# Altium PCB LaunchPad Mini.PcbDoc
Units mil, origin at the board's own origin, x right, y up, seen from the top; angles counter-clockwise.
Board outline 6000 x 4000 mil, 2 copper layers (Top Layer, Bottom Layer); 18 components, 30 nets, 82 pads, 4 vias.
Unrouted connection lines stored in the file: 1.
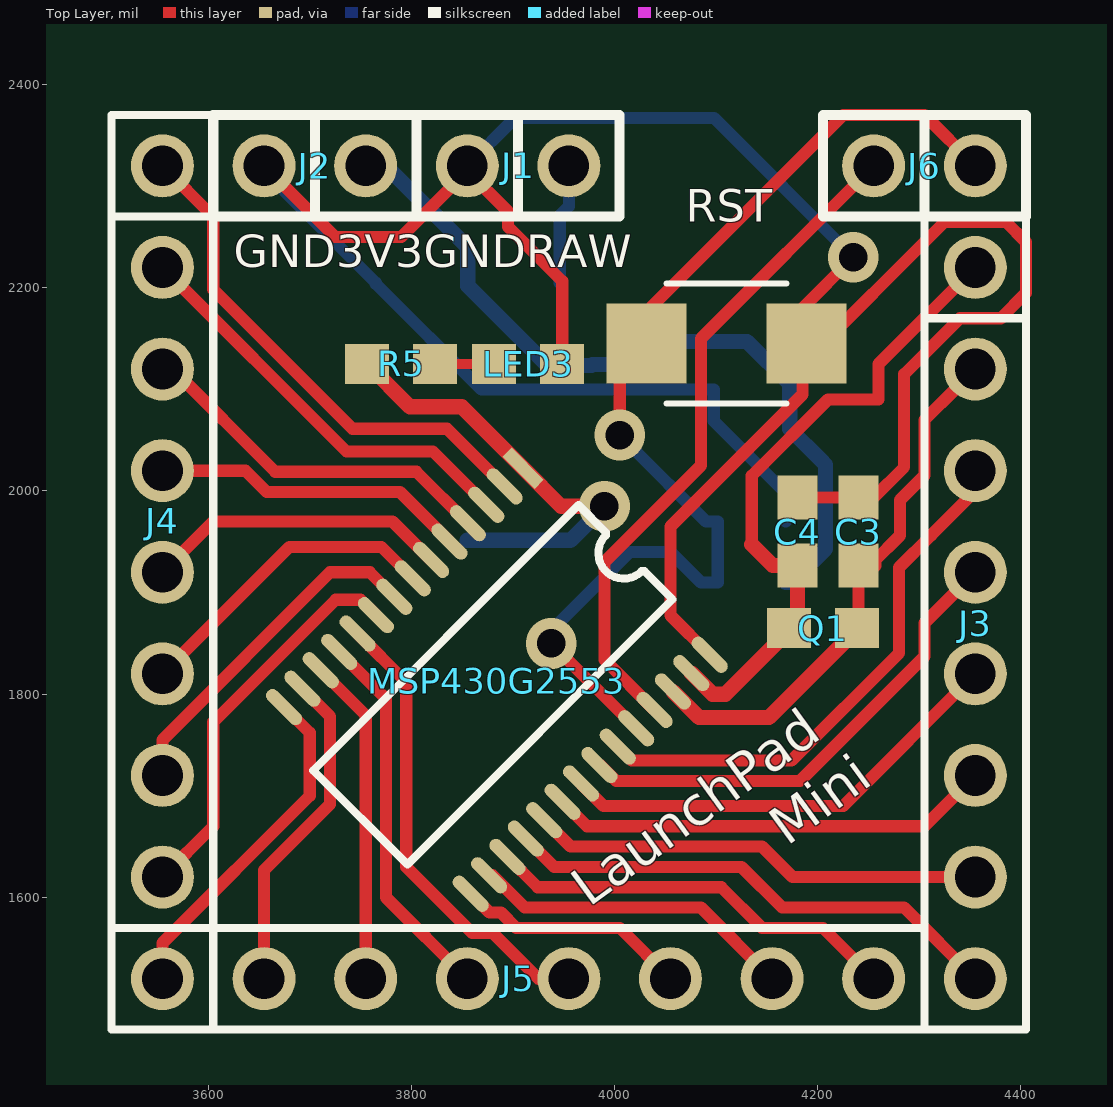
[diagram p0: Top Layer view]
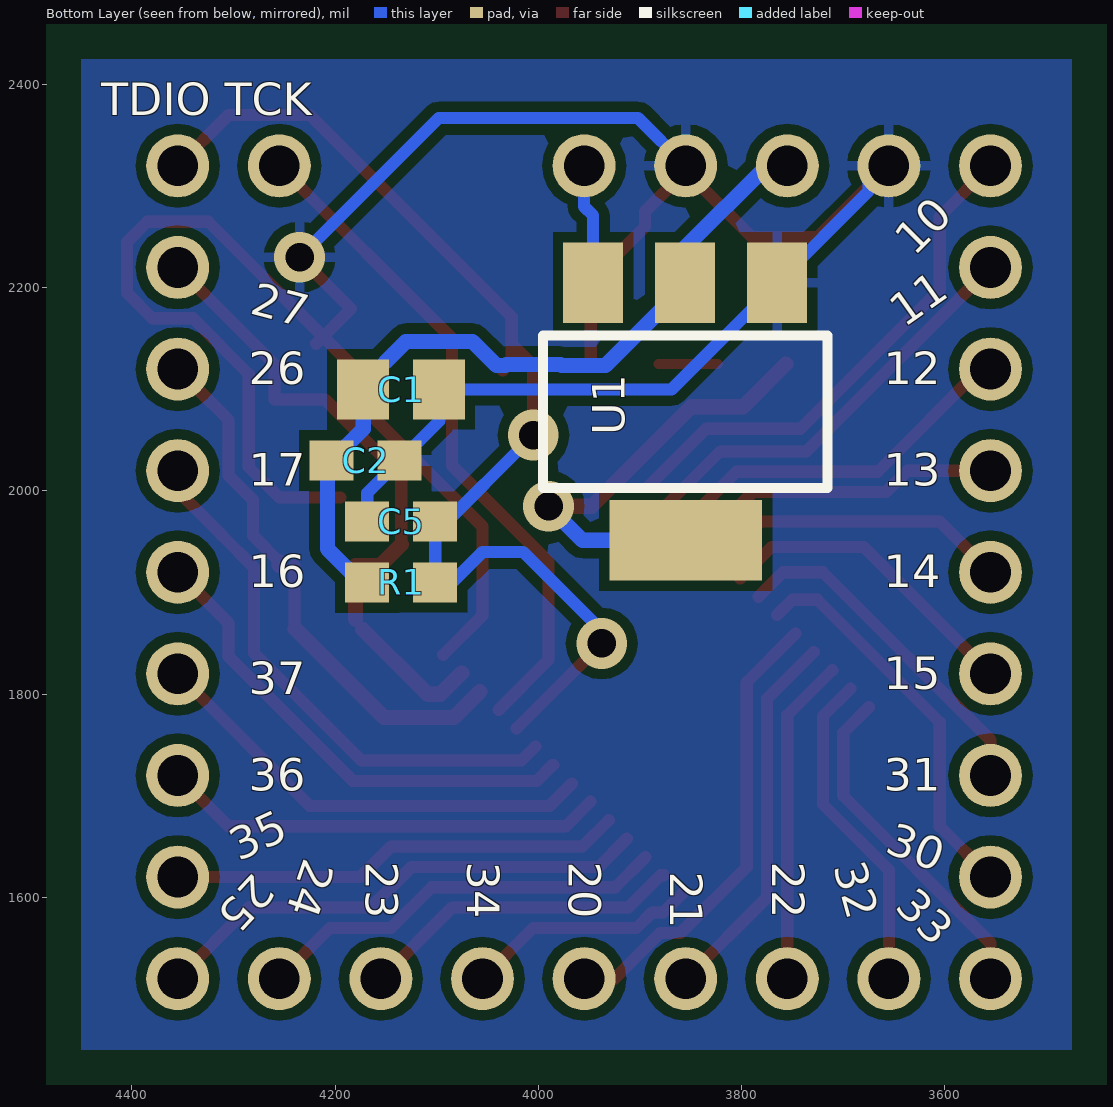
[diagram p1: Bottom Layer view, seen from below]

## Layer stack, top to bottom
Top Layer: signal copper 1.4
Dielectric: dielectric 12.6, FR-4, Dk 4.8
Bottom Layer: signal copper 1.4

## Board outline
1000,1000 7000,1000 7000,5000 1000,5000

## Design rules (kind name [scope] priority, off if disabled: settings)
Clearance Clearance_1 [OnLayer('Bottom Layer')] p1: gap=10
Clearance [OnLayer('Top Layer') vs OnLayer('Top Layer')] p2: gap=8
ComponentClearance [All] p1: gap=0 collisioncheckmode=3 verticalgap=0 showdistances=TRUE
PolygonConnect [All] p1: connectstyle=Relief reliefconductorwidth=10 reliefentries=4 polygonreliefangle="90 Angle"
RoutingVias [All] p1: holewidth=20 width=40 viastyle="Through Hole" minholewidth=20 minwidth=40 maxholewidth=28 maxwidth=50
SilkscreenOverComponentPads [All] p1: minsilkscreentomaskgap=10
SolderMaskExpansion [All] p1: expansion=4
Width WidthVCC [InNet('VCC')] p1: maxlimit=30 minlimit=10 preferedwidth=12 minimp=50.000000 maximp=50.000000 favimp=50.000000
Width WidthGND [InNet('GND')] p2: maxlimit=60 minlimit=10 preferedwidth=60 minimp=50.000000 maximp=50.000000 favimp=50.000000
Width [All] p3: maxlimit=40 minlimit=10 preferedwidth=12 minimp=50.000000 maximp=50.000000 favimp=50.000000
26 further rules are at their usual default settings.

## Components (designator, comment, footprint, x,y, rotation, side; value= is the part's Value field where it differs from the comment)
C1 "10uF/10V" CR2012-0805 4135,2100 r0 bottom
C2 "100nF" CR1608-0603 4170,2030 r0 bottom
C3 "12pF" CR1608-0603 4240,1960 r270 top
C4 "12pF" CR1608-0603 4180,1960 r270 top
C5 "1nF" CR1608-0603 4135,1970 r0 bottom
J1 "VCCINPUT" SIP2-2.54 3955,2320 r180 top (schematic designator J2)
J2 "SIP2" SIP2-2.54 3755,2320 r180 top (schematic designator J1)
J3 "SIP8" SIP8-2.54 4355,2220 r270 top (schematic designator P4)
J4 "SIP8" SIP8-2.54 3555,2320 r270 top
J5 "SIP8" SIP8-2.54 3555,1520 r0 top
J6 "SIP2" SIP2-2.54 4255,2320 r0 top
LED3 "LED3" CR1608-0603 3915,2125 r0 top
MSP430G2553 "28PIN SOCKET" TSSOP-28 3910,2025 r315 top
Q1 "QUARZ5" CR1608-0603 4205,1865 r0 top
R1 "47k" CR1608-0603 4135,1910 r0 bottom
R5 "270R" CR1608-0603 3790,2125 r0 top
RST "" PCBComponent_1 4110,2145 r180 top
U1 "TLV1117-33" SOT-223 3765,2205 r0 bottom

## Footprints (in the part's own frame and the unit in brackets; to place one, negate y for a bottom-side part, rotate by r counter-clockwise, add the part's x,y. Pads: shape width x height; smd on the part's side, far side on the other; paste and mask are expansions set on the pad)
CR1608-0603 [mm] "Chip Resistor; Body 1.6 x 0.8 mm (LxW typ)"
  rect 1.1x1 smd: 1(-0.85,0) 2(0.85,0)
CR2012-0805 [mm] "Chip Resistor; Body 2.0 x 1.3 mm (LxW typ)"
  rect 1.3x1.5 smd: 1(-0.95,0) 2(0.95,0)
PCBComponent_1 [mm]
  rect 2x2 smd: 1(-2,0) 2(2,0)
  silkscreen extent -1.5,-1.5 1.5,1.5
SIP2-2.54 [mil]
  round 62 hole 40: 1(0,0) 2(100,0)
  silkscreen extent -50,-50 150,50
SIP8-2.54 [mil]
  round 62 hole 40: 1(0,0) 2(100,0) 3(200,0) 4(300,0) 5(400,0) 6(500,0) 7(600,0) 8(700,0)
  silkscreen extent -50,-50 750,50
SOT-223 [mil]
  rect 59x79 smd: 1(0,0) 2(90.55,0) 3(181.1,0)
  rect 150x79 smd: 2(89.88,253.54)
  silkscreen extent -49,52 231,202
TSSOP-28 [mil]
  rect 45x12.99 smd: 1(1.63,-1.79)
  oval 45x12.99 smd: 2(1.63,-27.39) 3(1.63,-52.98) 4(1.63,-78.57) 5(1.63,-104.16) 6(1.63,-129.75) 7(1.63,-155.34) 8(1.63,-180.93) 9(1.63,-206.52) 10(1.63,-232.11) 11(1.63,-257.7) 12(1.63,-283.29) 13(1.63,-308.88) 14(1.63,-334.47) 15(261.47,-334.47) 16(261.47,-308.88) 17(261.47,-283.29) 18(261.47,-257.7) 19(261.47,-232.11) 20(261.47,-206.52) 21(261.47,-180.93) 22(261.47,-155.34) 23(261.47,-129.75) 24(261.47,-104.16) 25(261.47,-78.57) 26(261.47,-52.98) 27(261.47,-27.39) 28(261.47,-1.79)
  silkscreen extent 66,-358 197,11

## Part data
C1 C2 C3 C4 C5: library part CAP, "Capacitor"
J1: library part SIP2, "join"
J2 J3 J4 J5 J6: "join"
LED3: library part LED
MSP430G2553: library part ATMEGA8_DIP28, "Atmel Microcontroller - Library created by carel..  <www.mpfreezon"
Q1: "Crystal Oscillator"
R1 R5: library part RES2
RST: library part "SW SPST"
U1: library part 78L05, "3-Terminal Positive Voltage"

## Via types
v1: diameter 50, hole 28, Top Layer to Bottom Layer, 4 vias

## Nets (pads, with @x,y where several pads share a name; then routed paths per layer and width w, separated by ;. In a path a pad name is that pad's centre, name@x,y a point inside that pad or via, vN(x,y) a via of type N, cw(c..) or ccw(c..) an arc to the next point about the centre after c; other vN are vias at no path point)
GND: C1.1 C2.1 C3.1 C4.1 C5.2 J1.2 J2.2 LED3.2 MSP430G2553.28 RST.1 U1.1 | length 2787.7
  Top Layer w12: J2.2 3725,2250 3790,2250 3855,2315 3895,2275 3895,2260 3948.46,2206.54 LED3.2 ; MSP430G2553.28 4055,1877.46 4055,1965 4185,2095 4185,2125 4325,2265 4385,2265 4405,2245 4405,2195 4380,2170 4340,2170 4285,2115 4285,2023.46 4255,1993.46 C4.1@4195,1993.46 ; RST.1@4218.74,2145 4184.37,2179.37 v1(4235,2230)
  Bottom Layer w12: J2.2@3675,2320 3675,2295 U1.1 ; U1.1@3765,2203.92 3868.92,2100 C1.1 4097.6,2068.94 C2.1 4168.46,1998.07 C5.2 ; J1.2 3902,2367 4098,2367 v1(4235,2230)
NetJ1_1: J1.1 U1.3 | length 118.7
  Bottom Layer w12: U1.3 3946.1,2271.1 3955,2280 J1.1
NetLED3_A: LED3.1 R5.2 | length 58.1
  Top Layer w10: R5.2 LED3.1
P1.0: J4.1 MSP430G2553.2 | length 509.5
  Top Layer w12: J4.1 3605,2270 3605,2198.28 3741.97,2061.31 3834.96,2061.31 MSP430G2553.2
P1.1: J4.2 MSP430G2553.3 | length 415.5
  Top Layer w12: J4.2 3736.01,2038.99 3821.09,2038.99 MSP430G2553.3
P1.2: J4.3 MSP430G2553.4 | length 363.4
  Top Layer w12: J4.3 3565,2120 3666.01,2018.99 3804.9,2018.99 MSP430G2553.4
P1.3: J4.4 MSP430G2553.5 | length 311.4
  Top Layer w12: J4.4 3636.72,2020 3657.72,1998.99 3788.71,1998.99 MSP430G2553.5
P1.4: J4.5 MSP430G2553.6 | length 300.8
  Top Layer w12: J4.5 3605,1970 3781.51,1970 MSP430G2553.6
P1.5: J4.6 MSP430G2553.7 | length 310.9
  Top Layer w12: J4.6 3680,1945 3770.32,1945 MSP430G2553.7
P1.6: J3.4 MSP430G2553.22 | length 452.5
  Top Layer w12: MSP430G2553.22 3986,1730.27 4001.62,1714.65 4182.54,1714.65 4305,1837.11 4305,1870 J3.4@4335,1900
P1.7: J3.3 MSP430G2553.23 | length 517
  Top Layer w12: MSP430G2553.23 4016.86,1734.65 4174.25,1734.65 4280,1840.4 4280,1924.8 4311.69,1956.48 4311.69,1956.69 J3.3@4355,2000
P2.0: J5.5 MSP430G2553.10 | length 455.2
  Top Layer w12: MSP430G2553.10 3795,1811.75 3795,1630 3860,1565 3880,1565 3925,1520 J5.5
P2.1: J5.4 MSP430G2553.11 | length 373.8
  Top Layer w12: MSP430G2553.11 3775,1795.56 3775,1600 J5.4
P2.2: J5.3 MSP430G2553.12 | length 341.8
  Top Layer w12: MSP430G2553.12 3755,1779.37 J5.3@3755,1500
P2.3: J5.7 MSP430G2553.16 | length 320.6
  Top Layer w12: MSP430G2553.16 3879.87,1621.7 3911.57,1590 4085,1590 J5.7
P2.4: J5.8 MSP430G2553.17 | length 410
  Top Layer w12: MSP430G2553.17 3924.37,1610 4105,1610 4145,1570 4205,1570 J5.8
P2.5: J3.8 MSP430G2553.18 | length 499.4
  Top Layer w12: MSP430G2553.18 3940.56,1630 4125,1630 4165,1590 4285,1590 J3.8
P3.0: J4.8 MSP430G2553.9 | length 389.5
  Top Layer w12: J4.8 3605,1670 3605,1772.47 3725.56,1893.03 3749.9,1893.03 MSP430G2553.9
P3.1: J4.7 MSP430G2553.8 | length 341.5
  Top Layer w12: J4.7 3555,1755 3720,1920 3759.13,1920 MSP430G2553.8
P3.2: J5.2 MSP430G2553.13 | length 323.6
  Top Layer w12: J5.2 3655,1626.72 3720,1691.72 3720,1778.17 MSP430G2553.13
P3.3: J5.1 MSP430G2553.14 | length 357.9
  Top Layer w12: J5.1@3555,1500 3555,1555 3700,1700 3700,1761.99 MSP430G2553.14
P3.4: J5.6 MSP430G2553.15 | length 231.2
  Top Layer w12: MSP430G2553.15 3876.99,1585 3888.28,1585 3903.28,1570 4005,1570 J5.6
P3.5: J3.7 MSP430G2553.19 | length 447.4
  Top Layer w12: MSP430G2553.19 3956.75,1650 4145,1650 4175,1620 J3.7
P3.6: J3.6 MSP430G2553.20 | length 436.8
  Top Layer w12: MSP430G2553.20 3972.94,1670 4305,1670 J3.6
P3.7: J3.5 MSP430G2553.21 | length 451.1
  Top Layer w12: MSP430G2553.21 3989.13,1690 4225,1690 J3.5
RST/SBWTDIO: C5.1 J6.2 MSP430G2553.24 R1.1 RST.2 | length 1120
  Top Layer w12: v1@3935,1850 v1(3937.7,1850) MSP430G2553.24 ; v1@4005,2060 4005,2123.74 RST.2@4026.26,2145 ; RST.2@4035,2118.74 4026.26,2127.48 RST.2@4026.26,2145 ; J6.2 4305,2370 4225,2370 4026.26,2171.26 RST.2@4026.26,2145
  Bottom Layer w12: v1(3937.7,1850) 3935,1850 3945,1860 3945,1870 4015,1940 4055,1940 4085,1910 R1.1 C5.1 4090,1970 4015,2045 v1@4000,2045
  other v1: 4005,2055
TEST/SBWTCK: J6.1 MSP430G2553.25 | length 685.6
  Top Layer w12: MSP430G2553.25 3990,1833.89 3990,1930 4085,2025 4085,2150 J6.1 J6.1@4275,2320
VCC: C1.2 C2.2 J2.1 MSP430G2553.1 R1.2 R5.1 U1.2 | length 1215.5
  Top Layer w15: R5.1 3798.72,2082.81 3849.65,2082.81 MSP430G2553.1 3947.46,1985 v1(3990,1985)
  Bottom Layer w15: J2.1 3775,2320 3855.55,2239.45 U1.2@3855.55,2205 ; U1.2@3854.88,1951.46 3956.46,1951.46 v1(3990,1985) ; U1.2@3855.55,2201.8 3933.85,2123.5 3977.28,2123.5 3978.28,2124.5 4031.72,2124.5 4032.72,2123.5 4041.23,2123.5 4064.76,2147.03 4130.44,2147.03 4172.4,2105.06 C1.2 4172.4,2061.06 C2.2 4207.62,2025.85 4207.62,1943.07 4174.55,1910 R1.2
XIN/P2.6: C3.2 J3.2 MSP430G2553.26 Q1.2 | length 493
  Top Layer w12: Q1.2@4240,1866.54 C3.2 ; C3.2@4255,1930.41 4280.9,1956.31 4280.9,1991.08 4305,2015.18 4305,2070 ; 4306.5,2071.5 J3.2@4335,2100
  Top Layer w15: MSP430G2553.26 4083.08,1777 4152,1777 Q1.2@4239.23,1864.23 ; C3.2@4255,1926.54 C3.2@4255,1930.41
XOUT/P2.7: C4.2 J3.1 MSP430G2553.27 Q1.1 | length 647
  Top Layer w12: 4135,1947.21 4135,2015 4210.13,2090.13 4259.87,2090.13 4259.87,2124.87 J3.1
  Top Layer w15: MSP430G2553.27 4096.27,1800 4109.19,1800 Q1.1@4172.86,1863.67 ; 4135,1947.21 4155.67,1926.54 C4.2 Q1.1@4180,1873.46 ; J3.1@4340,2220 J3.1

## Polygon pours and split planes (outlines as drawn)
GND on Bottom Layer "Bottom Layer-No Net" (solid, remove dead copper, pour order 4): 3475,2425 4450,2425 4450,1450 3475,1450 3475,2425

## Other copper
Top Layer:
  pour cut-out: 3585,2370 4005,2370 4005,2270 3585,2270
  pour cut-out: 3505,2370 3605,2370 3605,1570 3505,1570
  pour cut-out: 3505,1571.26 3505,1471.26 4305,1471.26 4305,1571.26
  pour cut-out: 3585,2370 4005,2370 4005,2270 3585,2270
  pour cut-out: 4205,2370 4405,2370 4405,2270 4205,2270
  pour cut-out: 4306.26,1470 4406.26,1470 4406.26,2270 4305,2270 4305,1471.26

## Silkscreen, mask and mechanical layers (free items; w line width, h text height)
Top Overlay:
  text "GND3V3GNDRAW" at 3625,2220 h32
  text "Mini" at 4170,1650 h38 r36.16
  text "LaunchPad" at 3975,1590 h38 r36.09
Bottom Overlay:
  text "TDIO TCK" at 4430,2370 h32
  text "10" at 3630,2230 h32 r315
  text "27" at 4285,2175 h32 r14.74
  text "11" at 3640,2160 h32 r324.78
  text "12" at 3660,2105 h32
  text "26" at 4285,2105 h32
  text "13" at 3660,2005 h32
  text "17" at 4285,2005 h32
  text "14" at 3660,1905 h32
  text "16" at 4285,1905 h32
  text "15" at 3660,1805 h32
  text "37" at 4285,1800 h32
  text "31" at 3660,1705 h32
  text "36" at 4285,1705 h32
  text "30" at 3660,1645 h32 r21.25
  text "24" at 4230,1640 h32 r109.18
  text "22" at 3770,1635 h32 r90
  text "20" at 3970,1635 h32 r90
  text "34" at 4070,1635 h32 r90
  text "23" at 4170,1635 h32 r90
  text "35" at 4295,1635 h32 r335.23
  text "32" at 3710,1630 h32 r74.48
  text "21" at 3870,1625 h32 r90
  text "25" at 4280,1625 h32 r132.88
  text "33" at 3650,1590 h32 r45